# Altium PCB SOT-23-HAND_2021-11-29.pcbdoc
Units mm, origin at the board's own origin, x right, y up, seen from the top; angles counter-clockwise.
Board outline 30.76 x 29.2 mm, 2 copper layers (Top Layer, Bottom Layer); 1 components, 0 nets, 3 pads, 0 vias.
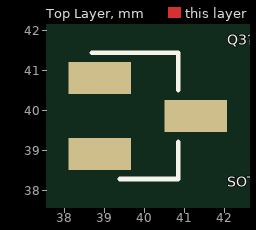
[diagram p0: Top Layer view]
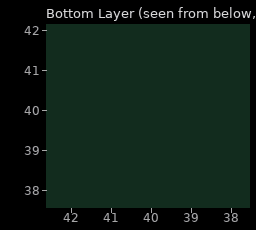
[diagram p1: Bottom Layer view, seen from below]

## Layer stack, top to bottom
Top Layer: signal copper (thickness not stored)
Dielectric: dielectric 0.32, FR-4, Dk 4.8
Bottom Layer: signal copper (thickness not stored)

## Board outline
56.157,25.4 25.4,25.4 25.4,54.604 56.157,54.604

## Components (designator, comment, footprint, x,y, rotation, side; value= is the part's Value field where it differs from the comment)
Q3? "SOT-23-HAND" SOT-23-HAND 40.08,39.875 r0 top

## Footprints (in the part's own frame and the unit in brackets; to place one, negate y for a bottom-side part, rotate by r counter-clockwise, add the part's x,y. Pads: shape width x height; smd on the part's side, far side on the other; paste and mask are expansions set on the pad)
SOT-23-HAND [mil]
  rect 61.42x31.5 smd: 1(-47.24,37.4) 2(-47.24,-37.4) 3(47.24,0)
  silkscreen extent -55,-62 30,62

## Nets (pads, with @x,y where several pads share a name; then routed paths per layer and width w, separated by ;. In a path a pad name is that pad's centre, name@x,y a point inside that pad or via, vN(x,y) a via of type N, cw(c..) or ccw(c..) an arc to the next point about the centre after c; other vN are vias at no path point)
pads on no net: Q3?.1 Q3?.2 Q3?.3

## Text inside footprints (layer, text, board x,y; h text height)
Q3?: Document "Q3" at 40.33,39.475 h0.5 r90